# Altium PCB RobonAUT_PCB.PcbDoc (part 2 of 2)
Units mil, origin at the board's own origin, x right, y up, seen from the top; angles counter-clockwise.
Board outline 5019.69 x 5708.66 mil, 2 copper layers (Top Layer, Bottom Layer), stack 62.441 mil thick; 70 components, 117 nets, 446 pads, 237 vias.
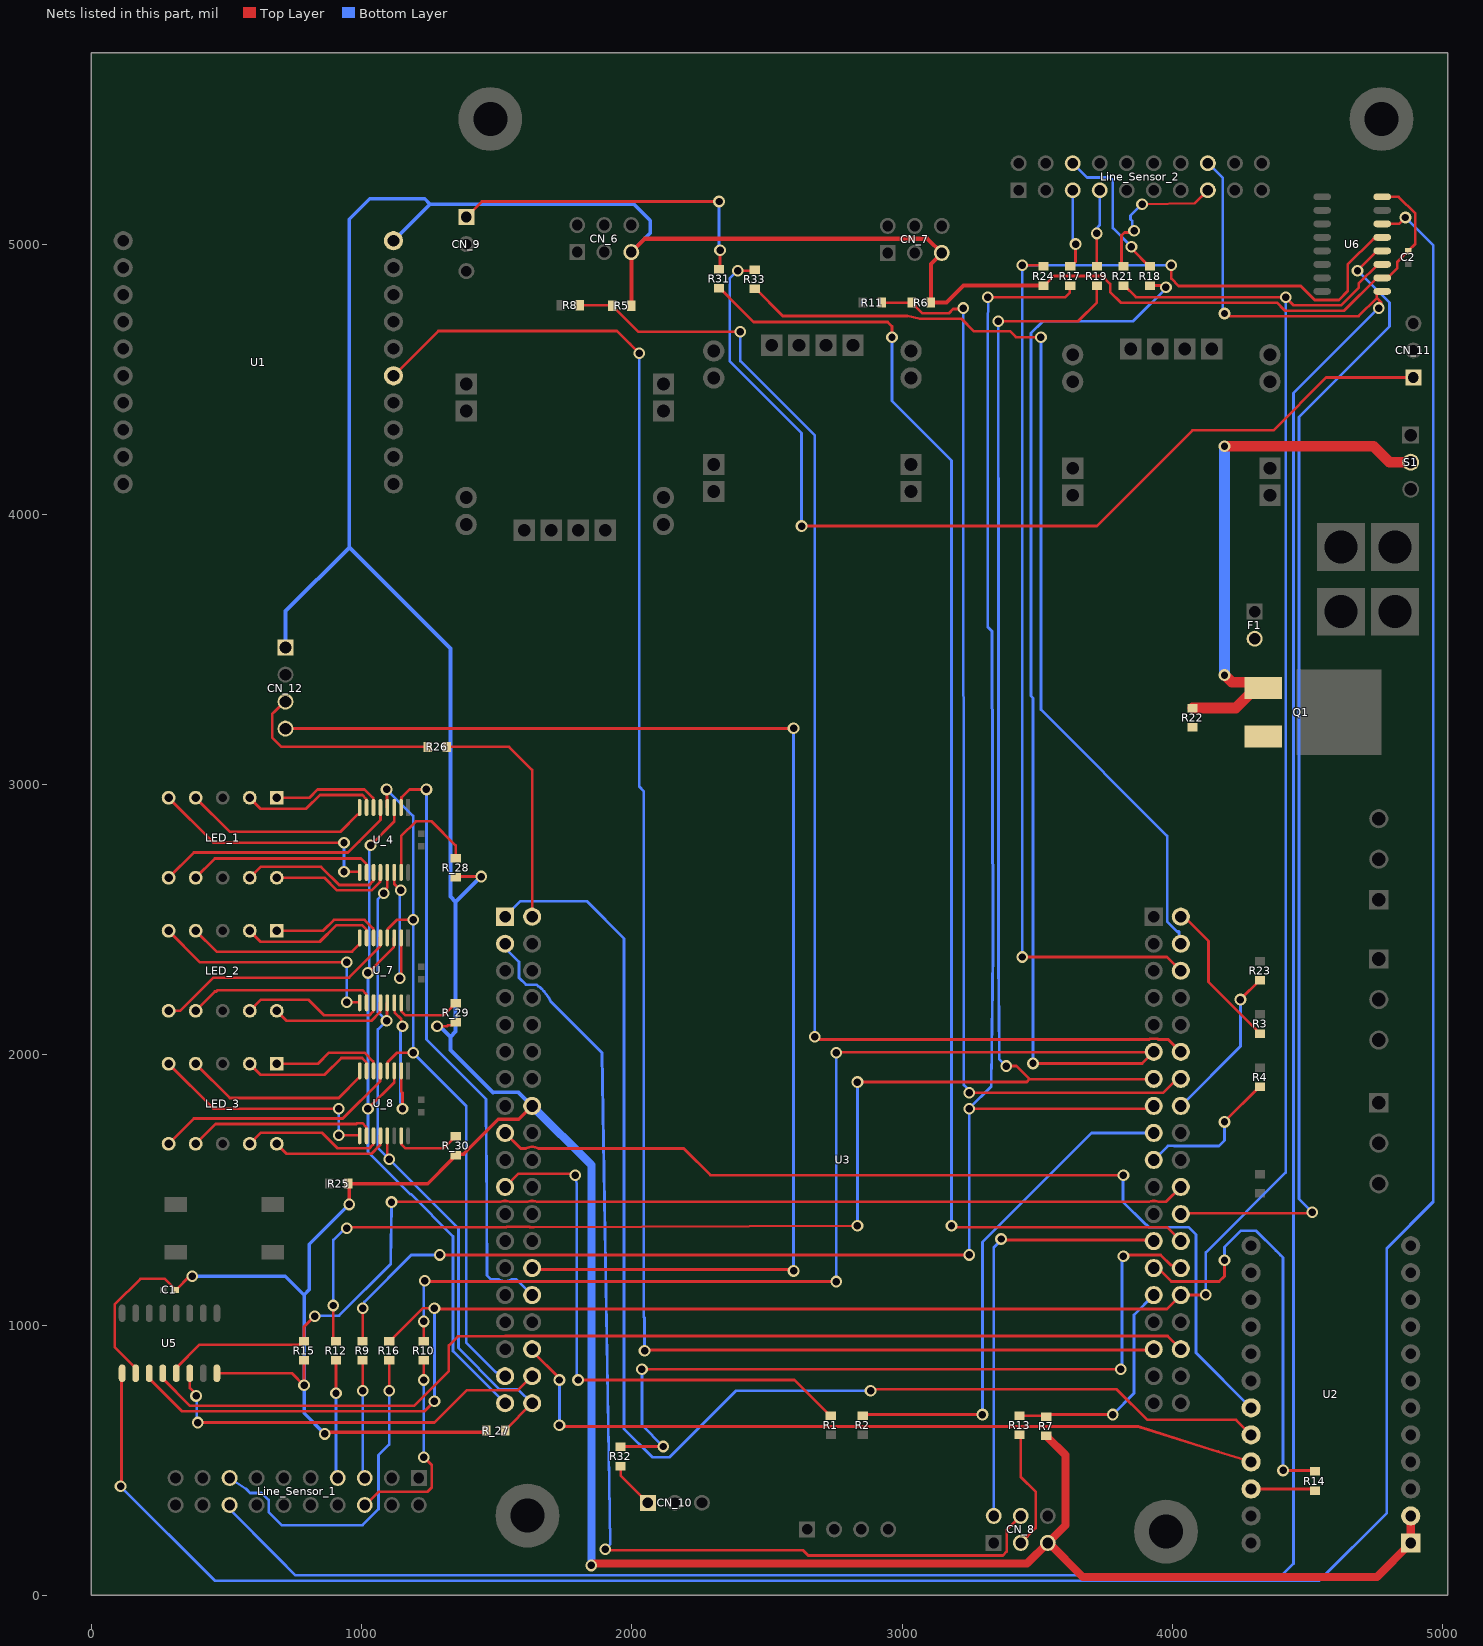
[diagram p2: the nets of this part, all layers, seen from the top]

## Via types
v1: diameter 43.31, hole 27.56, Top Layer to Bottom Layer, 234 vias
v2: diameter 43.31, hole 28, Top Layer to Bottom Layer, 3 vias

## Nets (pads, with @x,y where several pads share a name; then routed paths per layer and width w, separated by ;. In a path a pad name is that pad's centre, name@x,y a point inside that pad or via, vN(x,y) a via of type N, cw(c..) or ccw(c..) an arc to the next point about the centre after c; other vN are vias at no path point) (continued)
NetCN_8_2: CN_8.2 U3.63 | length 1603.9
  Top Layer w10: v1(3366.14,1318.9) 3369.95,1315.09 3927.35,1315.09 U3.63@3931.15,1311.29
  Bottom Layer w10: CN_8.2@3339.03,294.36 3339.03,1287.1 3366.14,1314.22 v1(3366.14,1318.9)
NetCN_8_3: CN_8.3 R13.1 | length 445.7
  Top Layer w10: CN_8.3@3439.03,194.36 3494.09,249.43 3494.09,383.82 3439.03,438.88 R13.1@3439.03,594.49
NetCN_8_4: CN_8.4 U3.3 | length 4072.2
  Top Layer w10: v1(1902.06,170.6) 1905.34,167.32 2633.55,167.32 2652.76,148.11 3373.05,148.11 3386.99,162.06 3386.99,242.33 CN_8.4@3439.03,294.36
  Bottom Layer w10: U3.3@1531.15,2411.29 1531.15,2396.01 1582.69,2344.48 1582.69,2285.42 1608.36,2259.75 1647.73,2259.75 1652.86,2254.62 cw(c1631.15,2211.29) 1665.42,2245.56 cw(c1534.83,2114.96) 1699.26,2199.07 cw(c1534.83,2114.96) 1699.96,2197.68 cw(c1692.94,2190.56) 1700.01,2197.63 1889.76,2007.87 1920.39,193.68 1920.39,189.55 1917.58,186.65 v1(1902.06,170.6)
NetCN_9_1: CN_9.1 R31.2 | length 1211.9
  Top Layer w10: CN_9.1@1387.8,5100 1445.28,5157.48 v1(2322.83,5157.48) ; R31.2@2322.83,4907.48 2326.55,4911.21 v1(2326.55,4977.27)
  Bottom Layer w10: v1(2322.83,5157.48) 2322.83,4980.99 v1(2326.55,4977.27)
NetCN_10_1: CN_10.1 R32.2 | length 177.8
  Top Layer w10: R32.2@1958.67,478.81 1958.67,443.62 CN_10.1@2059.5,342.79
NetCN_11_1: CN_11.1 R33.2 | length 3623.4
  Top Layer w10: v1(2391.73,4901.57) 2450.57,4901.57 R33.2@2454.77,4905.78 ; v1(2627.95,3956.69) 3720.47,3956.69 4074.8,4311.02 4373.37,4311.02 4568.64,4506.3 CN_11.1@4891.73,4506.3
  Bottom Layer w10: v1(2391.73,4901.57) 2362.2,4872.05 2362.2,4566.93 2627.95,4301.18 v1(2627.95,3956.69)
NetCN_12_3: CN_12.3 R26.2 | length 745.7
  Top Layer w10: CN_12.3@718.5,3307.09 714.59,3307.09 677.18,3269.67 669.29,3261.79 669.29,3173.64 703.18,3139.76 R26.2@1244.09,3139.76 R26.2@1244.82,3139.76
NetCN_12_4: CN_12.4 U3.28 | length 4860.1
  Top Layer w10: CN_12.4@718.5,3207.09 719.29,3207.87 2597.64,3207.87 v1(2598.43,3208.66) ; U3.28@1631.15,1211.29 1636.4,1206.04 2593.17,1206.04 v1(2598.43,1200.79)
  Bottom Layer w10: v1(2598.43,1200.79) v1(2598.43,3208.66)
NetF1_2: F1.2 Q1.3 R22.1
NetLED_1_1: LED_1.1 U_4.6 | length 417.8
  Top Layer w10: LED_1.1@686.27,2951.45 807.31,2951.45 837.71,2981.85 1011.28,2981.85 1042.81,2950.31 1042.81,2916.83 U_4.6@1044.29,2915.35
NetLED_1_2: LED_1.2 U_4.7 | length 507.7
  Top Layer w10: LED_1.2@586.27,2951.45 626.86,2910.86 795,2910.86 846,2961.85 1002.99,2961.85 1017.22,2947.62 1017.22,2916.83 U_4.7@1018.7,2915.35
NetLED_1_4: LED_1.4 U_4.8 | length 708.6
  Top Layer w10: LED_1.4@386.27,2951.45 512.6,2825.12 921.27,2825.12 985.01,2888.86 987.16,2888.86 993.11,2894.8 U_4.8@993.11,2915.35
NetLED_1_5: LED_1.5 U_4.9 | length 884.7
  Top Layer w10: LED_1.5@286.27,2951.45 452.29,2785.43 v1(935.04,2785.43) ; v1(935.04,2677.17) 991.14,2677.17 U_4.9@993.11,2675.2
  Bottom Layer w10: v1(935.04,2677.17) v1(935.04,2785.43)
NetLED_1_6: LED_1.6 U_4.5 | length 918.8
  Top Layer w10: LED_1.6@286.27,2655.38 379.67,2748.78 950.22,2748.78 990.58,2789.13 990.58,2789.55 1035.76,2834.74 1069.88,2868.86 U_4.5@1069.88,2915.35
NetLED_1_7: LED_1.7 U_4.10 | length 701.1
  Top Layer w10: LED_1.7@386.27,2655.38 457.27,2726.38 998.31,2726.38 1017.22,2707.46 1017.22,2676.67 U_4.10@1018.7,2675.2
NetLED_1_9: LED_1.9 U_4.11 | length 540
  Top Layer w10: LED_1.9@586.27,2655.38 626.86,2695.97 850.15,2695.97 917.42,2628.7 1028.58,2628.7 1042.81,2642.93 1042.81,2673.72 U_4.11@1044.29,2675.2
NetLED_1_10: LED_1.10 U_4.12 | length 450.1
  Top Layer w10: LED_1.10@686.27,2655.38 862.45,2655.38 909.14,2608.7 1036.87,2608.7 1068.41,2640.24 1068.41,2673.72 U_4.12@1069.88,2675.2
NetLED_2_1: LED_2.1 U_7.6 | length 421.8
  Top Layer w10: LED_2.1@686.27,2459.32 857.6,2459.32 897.85,2499.57 1011.28,2499.57 1042.81,2468.03 1042.81,2434.55 U_7.6@1044.29,2433.07
NetLED_2_2: LED_2.2 U_7.7 | length 511.7
  Top Layer w10: LED_2.2@586.27,2459.32 626.86,2418.73 845.29,2418.73 906.13,2479.57 1002.99,2479.57 1017.22,2465.34 1017.22,2434.55 U_7.7@1018.7,2433.07
NetLED_2_4: LED_2.4 U_7.8 | length 673.4
  Top Layer w10: LED_2.4@386.27,2459.32 463.7,2381.89 964.57,2381.89 993.11,2410.43 U_7.8@993.11,2433.07
NetLED_2_5: LED_2.5 U_7.9 | length 903.7
  Top Layer w10: LED_2.5@286.27,2459.32 403.07,2342.52 v1(944.88,2342.52) ; v1(944.88,2194.88) 991.14,2194.88 U_7.9@993.11,2192.91
  Bottom Layer w10: v1(944.88,2194.88) v1(944.88,2342.52)
NetLED_2_6: LED_2.6 U_7.5 | length 913.4
  Top Layer w10: LED_2.6@286.27,2163.26 328.87,2163.26 451.45,2285.84 953.44,2285.84 1068.41,2400.81 1068.41,2431.59 U_7.5@1069.88,2433.07
NetLED_2_7: LED_2.7 U_7.10 | length 701.3
  Top Layer w10: LED_2.7@386.27,2163.26 457.27,2234.25 462.6,2234.25 467.76,2239.41 1002.99,2239.41 1017.22,2225.18 1017.22,2194.39 U_7.10@1018.7,2192.91
NetLED_2_9: LED_2.9 U_7.11 | length 535.9
  Top Layer w10: LED_2.9@586.27,2163.26 626.86,2203.85 804.58,2203.85 862.01,2146.42 1028.58,2146.42 1042.81,2160.65 1042.81,2191.44 U_7.11@1044.29,2192.91
NetLED_2_10: LED_2.10 U_7.12 | length 446
  Top Layer w10: LED_2.10@686.27,2163.26 723.11,2126.42 1036.87,2126.42 1068.41,2157.96 1068.41,2191.44 U_7.12@1069.88,2192.91
NetLED_3_1: LED_3.1 U_8.6 | length 422.5
  Top Layer w10: LED_3.1@686.27,1967.19 838.2,1967.19 879.19,2008.19 1010.53,2008.19 1042.81,1975.9 1042.81,1942.42 U_8.6@1044.29,1940.94
NetLED_3_2: LED_3.2 U_8.7 | length 512.4
  Top Layer w10: LED_3.2@586.27,1967.19 626.86,1926.6 863.61,1926.6 925.2,1988.19 1002.24,1988.19 1017.22,1973.21 1017.22,1942.42 U_8.7@1018.7,1940.94
NetLED_3_4: LED_3.4 U_8.8 | length 713.9
  Top Layer w10: LED_3.4@386.27,1967.19 512.6,1840.87 915.67,1840.87 993.11,1918.31 U_8.8@993.11,1940.94
NetLED_3_5: LED_3.5 U_8.9 | length 874.8
  Top Layer w10: LED_3.5@286.27,1967.19 452.28,1801.18 v1(915.35,1801.18) ; v1(915.35,1702.76) 991.14,1702.76 U_8.9@993.11,1700.79
  Bottom Layer w10: v1(915.35,1702.76) v1(915.35,1801.18)
NetLED_3_6: LED_3.6 U_8.5 | length 917.1
  Top Layer w10: LED_3.6@286.27,1671.13 379.67,1764.53 930.54,1764.53 1068.41,1902.4 1068.41,1939.47 U_8.5@1069.88,1940.94
NetLED_3_7: LED_3.7 U_8.10 | length 701.3
  Top Layer w10: LED_3.7@386.27,1671.13 459.67,1744.53 980.47,1744.53 983.23,1747.28 1002.99,1747.28 1017.22,1733.05 1017.22,1702.26 U_8.10@1018.7,1700.79
NetLED_3_9: LED_3.9 U_8.11 | length 535.9
  Top Layer w10: LED_3.9@586.27,1671.13 626.86,1711.72 854.55,1711.72 911.98,1654.29 1028.58,1654.29 1042.81,1668.52 1042.81,1699.31 U_8.11@1044.29,1700.79
NetLED_3_10: LED_3.10 U_8.12 | length 446
  Top Layer w10: LED_3.10@686.27,1671.13 723.11,1634.29 1036.87,1634.29 1068.41,1665.83 1068.41,1699.31 U_8.12@1069.88,1700.79
NetLine_Sensor_1_5: Line_Sensor_1.5 R9.2 | length 451.1
  Top Layer w10: v1(1003.94,757.87) R9.2@1003.94,870.08
  Bottom Layer w10: v1(1003.94,757.87) 1003.94,442.52 Line_Sensor_1.5@1011.81,434.65 1011.81,431.1 Line_Sensor_1.5@1005.51,424.8
NetLine_Sensor_1_6: Line_Sensor_1.6 R10.1 | length 757
  Top Layer w10: Line_Sensor_1.6@1013.58,332.87 1064.57,383.86 1244.84,383.86 1259.84,398.87 1259.84,482.28 v1(1230.31,511.81) ; v1(1230.31,797.24) R10.1@1230.31,870.08
  Bottom Layer w10: v1(1230.31,511.81) v1(1230.31,797.24)
NetLine_Sensor_1_7: Line_Sensor_1.7 R12.2 | length 445.3
  Top Layer w10: v1(905.51,748.03) R12.2@905.52,870.08
  Bottom Layer w10: Line_Sensor_1.7@905.51,424.8 v1(905.51,748.03)
NetLine_Sensor_1_15: Line_Sensor_1.15 R16.2 | length 1251.3
  Top Layer w10: v1(1102.36,757.87) R16.2@1102.37,870.08
  Bottom Layer w10: Line_Sensor_1.15@506.91,424.8 Line_Sensor_1.15@511.81,434.65 573.33,394.02 576.26,391.09 588.01,379.33 612.04,379.33 ; 615.72,379 cw(c616.67,388.96) 615.64,379.01 612.04,379.33 ; v1(1102.36,757.87) 1102.36,558.69 1062.99,519.32 1062.99,319.31 1003.96,260.28 704.29,260.28 656.34,308.23 656.34,353.09 630.1,379.33 612.04,379.33
NetLine_Sensor_1_16: Line_Sensor_1.16 Line_Sensor_2.16 U6.9 | length 10105
  Top Layer w10: v1(4192.91,4743.1) 4201.93,4743.1 4211.71,4733.31 4689.32,4733.31 4756.41,4800.39 ; v1(4763.35,4763.35) 4773.34,4776.94 4773.34,4783.46 4771.03,4785.77 4756.41,4800.39 ; U6.9@4776.57,4825 4764.6,4825 4756.41,4816.82 4756.41,4800.39
  Bottom Layer w10: Line_Sensor_1.16@505.51,324.8 688.98,141.34 755.94,74.37 4328.33,74.37 4332.7,78.74 4409.45,78.74 4448.5,117.8 4448.5,4448.5 v1(4763.35,4763.35) ; Line_Sensor_2.16@4131.22,5299.21 4186.69,5243.74 4186.69,4749.32 v1(4192.91,4743.1)
NetLine_Sensor_2_5: Line_Sensor_2.5 R17.2 | length 296.1
  Top Layer w10: R17.2@3622.04,4917.33 3624.99,4917.33 3641.73,4934.07 v1(3641.73,5000)
  Bottom Layer w10: Line_Sensor_2.5@3631.22,5199.21 3631.22,5010.52 v1(3641.73,5000)
NetLine_Sensor_2_6: Line_Sensor_2.6 R18.1 | length 552.2
  Top Layer w10: v1(3848.66,4990.16) 3848.66,4983.03 3914.37,4917.33 R18.1@3917.32,4917.33
  Bottom Layer w10: Line_Sensor_2.6@3631.22,5299.21 3682.05,5248.37 3684.36,5246.06 3769.69,5246.06 3779.53,5236.22 3779.53,5059.06 3848.43,4990.16 v1(3848.66,4990.16)
NetLine_Sensor_2_7: Line_Sensor_2.7 R19.2 | length 286.3
  Top Layer w10: R19.2@3720.47,4917.34 v1(3720.47,5039.37)
  Bottom Layer w10: v1(3720.47,5039.37) 3720.47,5059.06 3731.22,5069.8 Line_Sensor_2.7@3731.22,5199.21
NetLine_Sensor_2_15: Line_Sensor_2.15 R21.2 | length 556.1
  Top Layer w10: R21.2@3818.89,4917.33 3812.01,4924.21 3812.01,5032.48 3822.65,5043.12 3852.01,5043.12 v1(3858.38,5049.49) ; v1(3887.8,5147.64) 4082.57,5150.57 Line_Sensor_2.15@4131.22,5199.21
  Bottom Layer w10: v1(3858.38,5049.49) 3852.01,5055.87 3852.01,5084.88 3845.36,5091.53 3845.36,5105.2 v1(3887.8,5147.64)
NetQ1_1: Q1.1 R22.2 S1.2 | length 2015
  Top Layer w39.37: R22.2@4074.8,3283.46 4233.94,3283.46 4308.19,3357.72 Q1.1@4336.14,3357.72 4311.43,3357.72 4290.17,3378.98 4220.51,3378.98 4193.98,3405.51 v1(4192.91,3405.51) ; v1(4192.91,4251.97) 4744.09,4251.97 4803.15,4192.91 S1.2@4881.89,4192.91
  Bottom Layer w39.37: v1(4192.91,3405.51) v1(4192.91,4251.97)
NetR1_2: R1.2 U3.21 | length 2031.1
  Top Layer w10: U3.21@1531.15,1511.29 1579.62,1559.75 1785.41,1559.75 v1(1790.18,1554.98) ; v1(1801.18,797.24) 2601.37,797.24 2733.26,665.35 R1.2@2736.21,665.35
  Bottom Layer w10: v1(1790.18,1554.98) 1796.26,1521.61 1796.26,802.17 v1(1801.18,797.24)
NetR2_1: R2.1 U3.55 | length 1883.8
  Top Layer w10: R2.1@2854.33,665.35 2858.27,669.29 v1(3297.24,669.29)
  Bottom Layer w10: v1(3297.24,669.29) 3297.24,1307.27 3701.27,1711.29 U3.55@3931.15,1711.29
NetR3_1: R3.1 U3.40 | length 563.1
  Top Layer w10: U3.40@4031.15,2511.29 4043.83,2511.29 4133.86,2421.26 4133.86,2270 4310.09,2093.77 4310.09,2090.82 4321.9,2079.01 R3.1@4324.85,2079.01
NetR4_1: R4.1 U3.57 | length 547.4
  Top Layer w10: v1(4192.91,1751.97) 4192.91,1753.17 4321.9,1882.15 R4.1@4324.85,1882.15
  Bottom Layer w10: U3.57@3931.15,1611.29 3983.25,1663.39 4005.91,1663.39 4006.47,1662.82 4172.67,1662.82 4192.91,1683.07 v1(4192.91,1751.97)
NetR5_1: R5.1 R8.2 U3.50 | length 4736.9
  Top Layer w10: R8.2@1807.09,4773.63 1922.55,4773.63 1939.03,4757.16 1941.98,4757.16 2023.94,4675.2 v1(2401.57,4675.2) ; v1(2677.17,2066.93) 2684.08,2060.02 2687.01,2057.09 3915.3,2057.09 3917.96,2059.75 3944.34,2059.75 3947.01,2057.09 3985.36,2057.09 3988.28,2054.16 U3.50@4031.15,2011.29
  Bottom Layer w10: v1(2401.57,4675.2) 2401.57,4566.93 2677.17,4291.34 v1(2677.17,2066.93)
NetR6_2: R6.2 R11.2 U3.52 | length 4042
  Top Layer w10: R11.2@2925.2,4783.47 3035.42,4783.47 3035.43,4780.51 3047.24,4768.69 3050.2,4768.69 3071.87,4747.02 3074.8,4744.09 3173.27,4744.09 3189.1,4759.92 3222.37,4759.92 v1(3225.76,4763.31) ; v1(3248.03,1860.24) 3966.54,1860.24 4017.59,1911.29 U3.52@4031.15,1911.29
  Bottom Layer w10: v1(3225.76,4763.31) 3228.35,1888.93 3231.28,1886.01 3248.03,1869.25 v1(3248.03,1860.24)
NetR7_2: R7.2 R13.2 U3.67 | length 854.2
  Top Layer w10: R13.2@3435.03,665.35 3529.52,665.35 R7.2@3533.46,661.42 3541.33,669.29 v1(3779.53,669.29)
  Bottom Layer w10: v1(3779.53,669.29) 3858.27,748.03 3858.27,1038.4 U3.67@3931.15,1111.29
NetR9_1: R9.1 R17.1 U3.53 | length 7065.8
  Top Layer w10: R9.1@1003.94,940.94 v1(1003.94,1062.99) ; v1(1289.37,1259.84) v1(3248.03,1259.84) ; v1(3248.03,1801.18) 3921.05,1801.18 U3.53@3931.15,1811.29 ; v1(3316.93,4803.15) 3602.36,4803.15 3620.79,4821.57 3620.79,4845.2 R17.1@3622.04,4846.46
  Bottom Layer w10: v1(1003.94,1062.99) 1010.31,1069.37 1010.31,1086.24 1183.91,1259.84 v1(1289.37,1259.84) ; v1(3248.03,1259.84) v1(3248.03,1801.18) 3329.91,1883.06 3336.3,2388.79 ; v1(3316.93,4803.15) 3319.26,4766.03 3319.26,4761.5 3316.93,4732.08 3316.93,3583.39 3329.91,3570.41 3332.83,3567.48 3336.3,2419.21 ; 3336.33,2388.82 3336.33,2419.19
NetR10_2: R10.2 R18.2 U3.49 | length 7570.8
  Top Layer w10: R10.2@1230.31,940.94 v1(1230.31,1013.78) ; v1(1233.59,1163.87) 1236.05,1161.42 v1(2755.91,1161.42) ; v1(2755.91,2007.87) 2757.61,2009.58 U3.49@3929.45,2009.58 ; v1(3484.25,1968.5) 3888.37,1968.5 U3.49@3929.45,2009.58 ; R18.2@3917.33,4846.46 3955.03,4846.46 3955.32,4846.18 3970,4846.18 v1(3976.06,4840.12) ; U3.49@3931.15,2011.29 U3.49@3929.45,2009.58
  Bottom Layer w10: v1(1230.31,1013.78) 1230.31,1160.6 v1(1233.59,1163.87) ; v1(2755.91,1161.42) v1(2755.91,2007.87) ; v1(3484.25,1968.5) 3484.25,3320.54 3477.13,3327.67 3477.13,4670.69 3521,4714.57 3854.33,4714.57 3976.06,4836.3 v1(3976.06,4840.12)
NetR12_1: R12.1 R19.1 U3.51 | length 7298.8
  Top Layer w10: v1(895.67,1072.83) 895.67,950.79 R12.1@905.51,940.94 ; v1(944.88,1358.27) 949.44,1362.82 1531.15,1362.82 ccw(c1531.15,1411.29) 1541.25,1363.89 1621.06,1363.89 1622.12,1362.82 1636.76,1362.82 v1(2834.65,1368.11) ; v1(2834.65,1899.61) 3444.88,1899.61 3445.29,1900.02 3461.13,1900.02 3471.48,1910.37 ; v1(3356.3,4714.57) 3651.57,4714.57 3720.47,4783.46 R19.1@3720.47,4846.46 ; v1(3385.83,1958.66) 3423.19,1958.66 3471.48,1910.37 ; U3.51@3931.15,1911.29 3930.23,1910.37 3471.48,1910.37
  Bottom Layer w10: v1(895.67,1072.83) 895.67,1315.3 938.64,1358.27 v1(944.88,1358.27) ; v1(2834.65,1368.11) v1(2834.65,1899.61) ; 3356.3,4134.23 v1(3356.3,4714.57) ; 3356.33,4134.2 3356.33,2380.54 3359.23,1985.26 v1(3385.83,1958.66)
NetR14_1: R14.1 U2.22 | length 238.8
  Top Layer w10: U2.22@4291.34,394.09 4521.26,394.09 R14.1@4527.56,387.8
NetR14_2: R14.2 U3.65 | length 1588.4
  Top Layer w10: U3.65@3931.15,1211.29 3946.19,1211.29 3996.06,1161.42 4173.23,1161.42 4192.91,1181.1 v1(4192.91,1240.16) ; v1(4409.45,462.6) 4523.62,462.6 R14.2@4527.55,458.66
  Bottom Layer w10: v1(4192.91,1240.16) 4192.91,1289.37 4252.73,1349.19 4310.26,1349.19 4382.85,1276.6 4399.61,1259.84 4409.45,1250 v1(4409.45,462.6)
NetR15_1: R15.1 U3.60 U5.13 | length 4178.5
  Top Layer w10: U5.13@314.42,822.12 314.42,841.8 400.53,927.91 767.84,927.91 770.13,930.2 776.65,930.2 R15.1@787.4,940.94 787.4,994.09 v1(826.77,1033.46) ; v1(1110.89,1455.38) 1112.21,1456.69 1514.2,1456.69 cw(c1531.15,1411.29) 1548.1,1456.69 1614.2,1456.69 cw(c1631.15,1411.29) 1648.1,1456.69 3914.2,1456.69 cw(c3931.15,1411.29) 3948.1,1456.69 3976.56,1456.69 U3.60@4031.15,1511.29
  Bottom Layer w10: v1(826.77,1033.46) 828.49,1035.18 917.07,1035.18 1107.96,1226.07 v1(1110.89,1455.38)
NetR16_1: R16.1 R21.1 U3.68 U5.11 U6.11 | length 9453.4
  Top Layer w10: U5.11@214.42,822.12 214.42,802.43 335.32,681.54 1232.72,681.54 v1(1269.68,718.5) ; R16.1@1102.36,940.95 1105.31,940.95 1227.35,1062.99 v1(1269.68,1062.99) 1272.92,1059.75 3979.62,1059.75 4031.61,1111.75 4123.56,1111.75 v1(4124.02,1112.2) ; R21.1@3818.89,4846.46 3821.85,4846.46 3864.85,4803.46 4418.98,4803.46 4449.13,4773.31 4624.43,4773.31 4689.17,4838.05 4689.17,4853.87 4760.3,4925 U6.11@4776.57,4925
  Bottom Layer w10: v1(1269.68,718.5) v1(1269.68,1062.99) ; v1(4124.02,1112.2) 4124.02,1269.68 4419.29,1564.96 v1(4419.29,4803.15)
NetR23_1: R23.1 U3.54 | length 588
  Top Layer w10: v1(4251.97,2204.72) 4251.97,2205.92 4321.9,2275.86 R23.1@4324.85,2275.86
  Bottom Layer w10: U3.54@4031.15,1811.29 4251.97,2032.1 v1(4251.97,2204.72)
NetR24_1: R24.1 U3.44 U6.13 | length 4819.5
  Top Layer w10: v1(3444.88,2362.2) 3980.24,2362.2 U3.44@4031.15,2311.29 ; v1@3448.81,4917.33 v1(3444.88,4921.26) 3519.69,4921.26 R24.1@3523.62,4917.33 ; v1(3996.06,4921.26) 3996.06,4871.95 4022.78,4845.24 4474.9,4845.24 4526.83,4793.31 4616.14,4793.31 4648.39,4825.55 4648.39,4923.98 4743.5,5019.09 4746.76,5019.09 4752.67,5025 U6.13@4776.57,5025
  Bottom Layer w10: v1(3444.88,2362.2) v1(3444.88,4921.26) v1(3996.06,4921.26)
NetR26_1: R26.1 U3.2 | length 894.4
  Top Layer w10: R26.1@1314.96,3139.76 1545.28,3139.76 1631.15,3053.89 U3.2@1631.15,2511.29
NetR31_1: R31.1 U3.64 | length 4988.7
  Top Layer w10: R31.1@2322.83,4836.61 2325.79,4836.61 2398.62,4763.78 2450.76,4711.64 2946.46,4711.64 2962.6,4695.5 v1(2962.6,4655.51) ; v1(3182.85,1368.11) 3188.14,1362.82 3979.62,1362.82 U3.64@4031.15,1311.29
  Bottom Layer w10: v1(2962.6,4655.51) 2962.6,4419.29 3182.85,4199.03 v1(3182.85,1368.11)
NetR32_1: R32.1 U3.66 | length 2904.8
  Top Layer w10: R32.1@1958.66,549.67 1960.17,551.18 v1(2116.14,551.18) ; v1(2037.4,836.61) v1(3809.06,836.61) ; v1(3818.9,1255.23) 3823.51,1259.84 3956.69,1259.84 3993.93,1222.61 3996.81,1222.61 3997.24,1222.18 4020.26,1222.18 U3.66@4031.15,1211.29
  Bottom Layer w10: v1(2037.4,836.61) 2037.4,629.92 v1(2116.14,551.18) ; v1(3809.06,836.61) 3813.98,841.54 3813.98,1250.31 v1(3818.9,1255.23)
NetR33_1: R33.1 U3.42 | length 3592.1
  Top Layer w10: R33.1@2454.78,4834.91 2457.73,4834.91 2558.39,4734.25 3018.63,4734.25 3066.51,4724.09 3218.82,4724.09 3265,4677.91 3399.2,4677.91 3421.61,4655.51 v1(3513.78,4655.51)
  Bottom Layer w10: v1(3513.78,4655.51) 3513.78,3277.56 3980.86,2810.48 3980.86,2493.04 4017.34,2456.56 4024.63,2456.56 4026.94,2415.5 U3.42@4031.15,2411.29
NetR_27_1: R_27.1 U3.38 U_4.13 U_7.13 U_8.13 | length 2581.3
  Top Layer w10: v1(1082.68,2598.43) 1082.68,2607.44 1095.47,2620.23 U_4.13@1095.47,2675.2 ; v1(1092.52,2125.98) 1094,2127.46 1094,2191.44 U_7.13@1095.47,2192.91 ; U_8.13@1095.47,1700.79 1095.47,1630.08 1102.36,1623.19 v1(1102.36,1614.17) ; R_27.1@1530.8,610.93 U3.38@1631.15,711.29
  Bottom Layer w10: v1(1082.68,2598.43) 1060.3,2576.04 1060.3,2158.21 v1(1092.52,2125.98) 1060.28,2093.74 1060.28,1656.26 v1(1102.36,1614.17) 1358.58,1357.95 1358.58,915.32 1511.08,762.82 1579.62,762.82 U3.38@1631.15,711.29
NetR_28_1: R_28.1 U_4.15 | length 446.9
  Top Layer w10: U_4.15@1146.65,2675.2 1146.65,2810.04 1200.79,2864.17 1259.84,2864.17 1348.43,2775.59 R_28.1@1348.43,2728.35 R_28.1@1348.43,2724.41
NetR_29_1: R_29.1 U_7.15 | length 259.2
  Top Layer w10: U_7.15@1146.65,2192.91 1148.13,2191.44 1148.13,2160.65 1162.36,2146.42 1303.9,2146.42 1334.72,2177.24 1334.72,2180.2 1345.47,2190.94 R_29.1@1348.43,2190.94
NetR_30_1: R_30.1 U_8.15 | length 259.2
  Top Layer w10: U_8.15@1146.65,1700.79 1148.13,1699.31 1148.13,1668.52 1162.36,1654.29 1303.9,1654.29 1334.72,1685.12 1334.72,1688.07 1345.47,1698.82 R_30.1@1348.43,1698.82
NetU1_12: U1.12 U3.71 | length 6597.8
  Top Layer w10: U1.12@1118.11,4512.6 1284.25,4678.74 1289.37,4678.74 1945.28,4678.74 1993.07,4630.94 v1(2027.56,4596.46) ; v1(2047.24,905.51) 2050.13,908.4 3928.26,908.4 U3.71@3931.15,911.29
  Bottom Layer w10: v1(2027.56,4596.46) 2027.56,2992.3 2044.53,2975.33 2044.53,1030.19 2047.24,1027.47 v1(2047.24,905.51)
NetU2_19: U2.19 U3.17 | length 3499.4
  Top Layer w10: U3.17@1531.15,1711.29 1585.97,1656.47 1588.9,1653.54 1607.42,1653.54 cw(c1631.15,1611.29) 1654.89,1653.54 2192.95,1653.54 2195.88,1650.61 2291.38,1555.12 v1(3818.9,1555.12)
  Bottom Layer w10: v1(3818.9,1555.12) 3817.67,1553.89 3817.67,1456.24 3896.88,1377.02 ccw(c3931.15,1411.29) 3905.28,1370.31 3909.84,1365.75 3912.77,1362.82 4060.4,1362.82 4087.36,1335.87 4087.36,898.07 U2.19@4291.34,694.09
NetU2_20: U2.20 U3.1 | length 4873.1
  Top Layer w10: v1(2883.33,757.87) 2888.28,762.82 3794.26,762.82 3907.48,649.61 4235.83,649.61 U2.20@4291.34,594.09
  Bottom Layer w10: U3.1@1531.15,2511.29 1588.76,2568.9 1833.33,2568.9 1971.22,2431.01 1971.22,616.12 2075.53,511.81 2140.28,511.81 2386.34,757.87 v1(2883.33,757.87)
NetU2_21: U2.21 U3.34 | length 2904.4
  Top Layer w10: U3.34@1631.15,911.29 1631.15,904.83 1732.28,803.7 v1(1732.28,797.24) ; v1(1732.28,629.92) 1736.97,625.24 3873.8,625.24 4169.38,532.4 U2.21@4291.34,494.09
  Bottom Layer w10: v1(1732.28,629.92) v1(1732.28,797.24)
NetU3_30: U3.30 U_4.2 | length 2231.7
  Top Layer w10: U_4.2@1146.65,2915.35 1148.13,2916.83 1148.13,2952.81 1177.61,2982.28 v1(1240.16,2982.28)
  Bottom Layer w10: v1(1240.16,2982.28) 1240.16,2057.09 1460.79,1836.45 1463.19,1424.39 1464.1,1183.54 1478.28,1169.36 1506.85,1169.36 ccw(c1531.15,1211.29) 1555.45,1169.36 1573.09,1169.36 U3.30@1631.15,1111.29
NetU3_35: U3.35 U_4.4 U_7.4 U_8.4 | length 2714.8
  Top Layer w10: v1(1092.52,2982.28) 1094,2980.81 1094,2916.83 U_4.4@1095.47,2915.35 ; U_8.4@1095.47,1940.94 1096.95,1942.42 1096.95,1973.21 1131.61,2007.87 v1(1190.94,2007.87) ; U_7.4@1095.47,2433.07 1096.95,2434.55 1096.95,2465.34 1131.61,2500 v1(1190.94,2500)
  Bottom Layer w10: v1(1092.52,2982.28) 1190.94,2883.86 v1(1190.94,2007.87) 1387.03,1811.79 1387.03,935.8 1497.21,825.63 1501.41,825.63 1515.75,811.29 U3.35@1531.15,811.29
NetU3_36: U3.36 U5.14 | length 1503
  Top Layer w10: U5.14@364.42,822.12 364.42,774.64 364.79,774.26 364.79,767.19 387.62,744.36 v1(387.62,738.19) ; v1(393.7,639.76) 1269.69,639.76 1389.67,759.75 1579.62,759.75 U3.36@1631.15,811.29
  Bottom Layer w10: v1(387.62,738.19) 390.66,735.15 390.66,642.8 v1(393.7,639.76)
NetU3_37: U3.37 U_4.3 U_7.3 U_8.3 | length 2806.6
  Top Layer w10: v1(1023.62,1801.18) 1121.06,1898.62 U_8.3@1121.06,1940.94 ; v1(1023.62,2303.15) 1119.59,2399.11 1119.59,2431.59 U_7.3@1121.06,2433.07 ; v1(1033.46,2775.59) 1121.06,2863.19 U_4.3@1121.06,2915.35
  Bottom Layer w10: v1(1033.46,2775.59) 1028.54,2770.67 1028.54,2308.07 v1(1023.62,2303.15) v1(1023.62,1801.18) 1023.62,1641.08 1179.79,1484.91 1182.41,1484.91 1338.58,1328.74 1338.58,903.86 U3.37@1531.15,711.29
NetU3_62: U3.62 U6.12 | length 4312.2
  Top Layer w10: U3.62@4031.15,1411.29 4034.17,1414.31 4514.7,1414.31 v1(4517.72,1417.32) ; v1(4685.04,4901.57) 4685.04,4902.36 4757.68,4975 U6.12@4776.57,4975
  Bottom Layer w10: U3.62@4031.15,1411.29 U3.62@4037.19,1417.32 ; v1(4517.72,1417.32) 4468.5,1466.54 4468.5,4360.24 4803.15,4694.88 4803.15,4783.46 v1(4685.04,4901.57)
NetU3_72: U3.72 U5.12 | length 4010.1
  Top Layer w10: U5.12@264.42,822.12 264.42,802.43 365.32,701.54 1193.66,701.54 1323.09,830.97 1323.09,925.2 1356.59,958.69 1521.06,958.69 cw(c1531.15,911.29) 1531.15,959.75 3982.69,959.75 U3.72@4031.15,911.29
NetU5_9: U5.9 U6.14 | length 10357.3
  Top Layer w10: v1(108.27,403.54) 111.82,407.1 111.82,819.52 U5.9@114.42,822.12 ; U6.14@4776.57,5075 4838.78,5075 v1(4862.2,5098.43)
  Bottom Layer w10: v1(108.27,403.54) 457.44,54.37 4542.56,54.37 4793.31,305.12 4793.31,1284.69 4965.31,1456.69 4965.31,4725.06 4965.31,4995.31 4962.39,4998.24 v1(4862.2,5098.43)
NetU_4_14: U_4.14 U_7.2 | length 554.5
  Top Layer w10: U_4.14@1121.06,2675.2 1121.06,2632.61 v1(1144.79,2608.88) ; v1(1141.73,2283.46) 1141.73,2293.31 1146.65,2298.23 U_7.2@1146.65,2433.07
  Bottom Layer w10: v1(1141.73,2283.46) 1141.73,2605.82 v1(1144.79,2608.88)
NetU_7_14: U_7.14 U_8.2 | length 552.1
  Top Layer w10: U_7.14@1121.06,2192.91 1122.54,2191.44 1122.54,2157.64 1146.81,2133.37 1146.81,2111.06 v1(1151.57,2106.3) ; U_8.2@1146.65,1940.94 1146.65,1865.16 1151.57,1860.24 v1(1151.57,1801.18)
  Bottom Layer w10: v1(1151.57,1801.18) 1145.2,1807.55 1145.2,1822.94 1144.45,1823.69 1144.45,2099.17 v1(1151.57,2106.3)
Nucleo_3V3: C1.2 C2.2 CN_6.5 CN_7.5 CN_8.5 CN_12.1 R5.2 R6.1 R7.1 R15.2 R24.2 R25.1 R_27.2 R_28.2 R_29.2 R_30.2 U1.2 U2.1 U2.2 U3.16 U5.10 U5.16 U6.10 U6.16 | length 19335.3
  Top Layer w10: U5.10@164.42,822.12 164.42,841.8 86.63,919.6 86.63,1075.76 182.13,1171.26 271.97,1171.26 C1.2@313.04,1130.19 363.96,1181.1 v1(374.02,1181.1) ; U5.16@464.42,822.12 742.84,822.12 v1(787.4,777.56) R15.2@787.41,870.08 ; v1(1279.53,2106.3) 1316.18,2106.3 1319.21,2109.33 1337.68,2109.33 R_29.2@1348.43,2120.08 R_29.2@1348.43,2124.01 ; R_28.2@1351.78,2659.76 v1(1442.49,2659.76) ; R5.2@1998.03,4771.98 R5.2@1998.08,4771.93 ; R24.2@3523.63,4846.46 3526.58,4846.46 3562.01,4881.89 3740.7,4881.89 3769.68,4852.91 3769.68,4822.83 3809.06,4783.46 4387.14,4783.46 4411.65,4758.96 4417.3,4753.31 4635.2,4753.31 4756.89,4875 U6.10@4776.57,4875 4796.26,4875 4832.24,4910.98 4832.24,4934.6 C2.2@4872.05,4974.41 4898.86,5001.22 4898.86,5113.61 4837.47,5175 U6.16@4776.57,5175
  Top Layer w13: v1@859.86,594.16 v1(863.3,597.6) 869.1,603.4 1453.8,603.4 R_27.2@1460.63,610.23 ; v1(954.72,1446.85) 954.72,1520.01 R25.1@950.84,1523.89 1244.37,1523.89 1334.73,1614.25 1334.73,1617.2 1349.16,1631.63 1377.95,1631.63 1377.95,1633.86 1505.35,1761.25 1581.12,1761.25 U3.16@1631.15,1811.29
  Top Layer w15: R5.2@1998.03,4771.98 CN_6.5@1998.03,4970.47 2047.24,5019.68 3094.41,5019.68 CN_7.5@3146.9,4967.19 3106.3,4926.59 R6.1@3106.3,4783.46 3163.75,4783.46 3226.75,4846.46 R24.2@3523.63,4846.46 ; CN_8.5@3539.03,194.36 CN_8.5@3543.06,194.36
  Top Layer w30: v1(1850.39,111.02) 1853.99,111.02 1861.08,118.11 3462.78,118.11 CN_8.5@3539.03,194.36 3604.38,259.71 3604.38,519.64 3537.17,586.85 3537.17,589.8 3536.42,590.55 R7.1@3533.46,590.55 ; CN_8.5@3543.06,194.36 3668.53,68.9 4305.48,68.9 4305.68,68.7 4756.5,68.7 U2.1@4881.89,194.09 U2.2@4881.89,294.09
  Bottom Layer w10: v1(1279.53,2106.3) 1280.31,2107.08 v1@1288.59,2107.08
  Bottom Layer w13: v1(374.02,1181.1) 717.48,1181.1 786.37,1112.2 787.4,1112.2 ; v1(863.3,597.6) 787.4,673.5 v1(787.4,777.56) 787.4,1112.2 ; v1(954.72,1446.85) 807.09,1299.21 807.09,1131.89 787.4,1112.2 ; 954.72,3877.95 954.72,5091.21 1030.84,5167.32 1233.46,5167.32 1253.15,5147.64 ; U1.2@1118.11,5012.6 1253.15,5147.64 ; 1486.22,1861.32 1581.12,1861.32 ; CN_6.5@1998.03,4970.47 2068.37,5040.81 2068.37,5087.14 2007.87,5147.64 1253.15,5147.64
  Bottom Layer w15: CN_12.1@718.5,3507.09 718.5,3641.73 954.72,3877.95 1003.94,3828.74 1328.74,3503.94 1328.74,2585.38 1348.43,2565.7 ; v1@1288.59,2107.08 1328.74,2066.93 ; v1@1442.01,2659.28 1348.43,2565.7 ; 1486.22,1861.32 1328.74,2018.8 1328.74,2066.93 ; 1581.12,1861.32 U3.16@1631.15,1811.29 ; 1328.74,2066.93 1348.43,2086.61 1348.43,2565.7
  Bottom Layer w30: U3.16@1631.15,1811.29 1850.39,1592.05 v1(1850.39,111.02)
pads on no net: CN_1.1 CN_1.2 CN_2.1 CN_6.1 CN_7.1 CN_8.1 S1.3 U1.3 U1.4 U1.5 U1.6 U1.7 U1.8 U1.9 U1.10 U1.11 U1.13 U1.14 U1.15 U1.16 U1.17 U1.18 U1.19 U1.20 U2.3 U2.6 U2.7 U2.8 U2.9 U2.10 U2.11 U2.12 U2.14 U2.15 U2.16 U2.18 U2.23 U3.5 U3.7 U3.9 U3.10 U3.11 U3.12 U3.13 U3.14 U3.15 U3.18 U3.23 U3.24 U3.25 U3.26 U3.27 U3.29 U3.31 U3.33 U3.45 U3.46 U3.48 U3.56 U3.59 U3.69 U3.73 U3.74 U3.75 U3.76 U_8.14

## Polygon pours and split planes (outlines as drawn)
GND on Bottom Layer "GND_L02_P011" (solid, remove dead copper, pour order 11): 0,0 0,5393.7 5019.68,5393.7 5019.68,0
11.1V on Bottom Layer "11.1V_L02_P004" (solid, remove dead copper, pour order 4): 2362.2,4438.98 2559.06,4242.13 2559.05,954.72 2372.05,767.72 2263.78,659.45 2076.77,659.45 2076.77,3897.64 2175.2,3897.64 2175.2,4124.02 2057.09,4124.02 2057.09,4586.61 2244.09,4586.61 2244.09,4438.98
6V_1 on Bottom Layer "6V_1_L02_P000" (solid, remove dead copper, pour order 0): 1269.68,5049.21 1742.13,5049.21 1742.13,3838.58 1476.38,3838.58 1476.38,4183.07 1279.53,4183.07 1269.68,4192.91
GND on Top Layer "GND_L01_P010" (solid, remove dead copper, pour order 10): 0,0 0,5374.02 5059.06,5374.02 5019.68,0
11.1V on Top Layer "11.1V_L01_P006" (solid, remove dead copper, pour order 6): 4753.94,2805.12 4566.93,2618.11 2076.77,2618.11 2076.77,2805.12 2076.77,2952.76 4448.82,2952.76 4448.82,3444.88 4970.47,3444.88 4970.47,2805.12
11.1V on Top Layer "11.1V_L01_P007" (solid, pour order 7): 1653.54,4005.91 1653.54,3828.74 1476.38,3828.74 1476.38,4330.71 2253.94,4330.71 2416.34,4542.32 2460.63,4694.88 2568.9,4694.88 2568.9,4576.77 2765.75,4576.77 2765.75,4694.88 2913.39,4694.88 2913.39,4370.08 3700.79,4370.08 3700.79,4714.57 3897.64,4714.57 3897.64,4557.09 4094.49,4557.09 4104.33,4566.93 4104.33,4655.51 4281.5,4655.51 4281.5,4488.19 4133.86,4340.55 4045.28,4340.55 3690.94,3986.22 3159.45,3986.22 3159.45,4242.13 2923.23,4242.13 2923.23,4005.91 2224.41,4005.91 2224.41,4133.86 2037.4,4133.86 2037.4,3828.74 1850.39,3828.74 1850.39,4005.91
NetF1_2 on Top Layer "NETF1_2_L01_P005" (solid, remove dead copper, pour order 5): 3828.74,3582.68 3828.74,3080.71 4438.98,3080.71 4438.98,3484.25 4340.55,3582.68 4320.87,3582.68
NetCN_4_1 on Top Layer "NETCN_4_1_L01_P001" (solid, remove dead copper, pour order 1): 4980.31,3454.72 4498.03,3454.72 4360.24,3592.52 4192.91,3592.52 4192.91,3759.84 4980.31,3759.84

## Keep-outs
Keep-Out Layer:
  the board outline again, w78.74

## Silkscreen, mask and mechanical layers (free items; w line width, h text height)
Top Overlay:
  text "LK Bulls / 2021 ;)" at 1761.81,5334.65 h78.74
Mechanical 1:
  lines w10: 3937.01,0 0,0 ; 0,0 0,5708.66 5019.68,5708.66 5019.68,0 0,0
  text ".Pcb_File_Name_No_Path" at 0,-98.43 h47.24

## Text inside footprints (layer, text, board x,y; h text height)
U3: Top Overlay "CN7" at 1481.15,2581.29 h47.24; Top Overlay "CN10" at 3881.15,2581.29 h47.24